# Altium PCB LazeRX-9c.PcbDoc
Units mm, origin at the board's own origin, x right, y up, seen from the top; angles counter-clockwise.
Board outline 42 x 28 mm, 2 copper layers (Top Layer, Bottom Layer); 46 components, 48 nets, 162 pads, 62 vias.
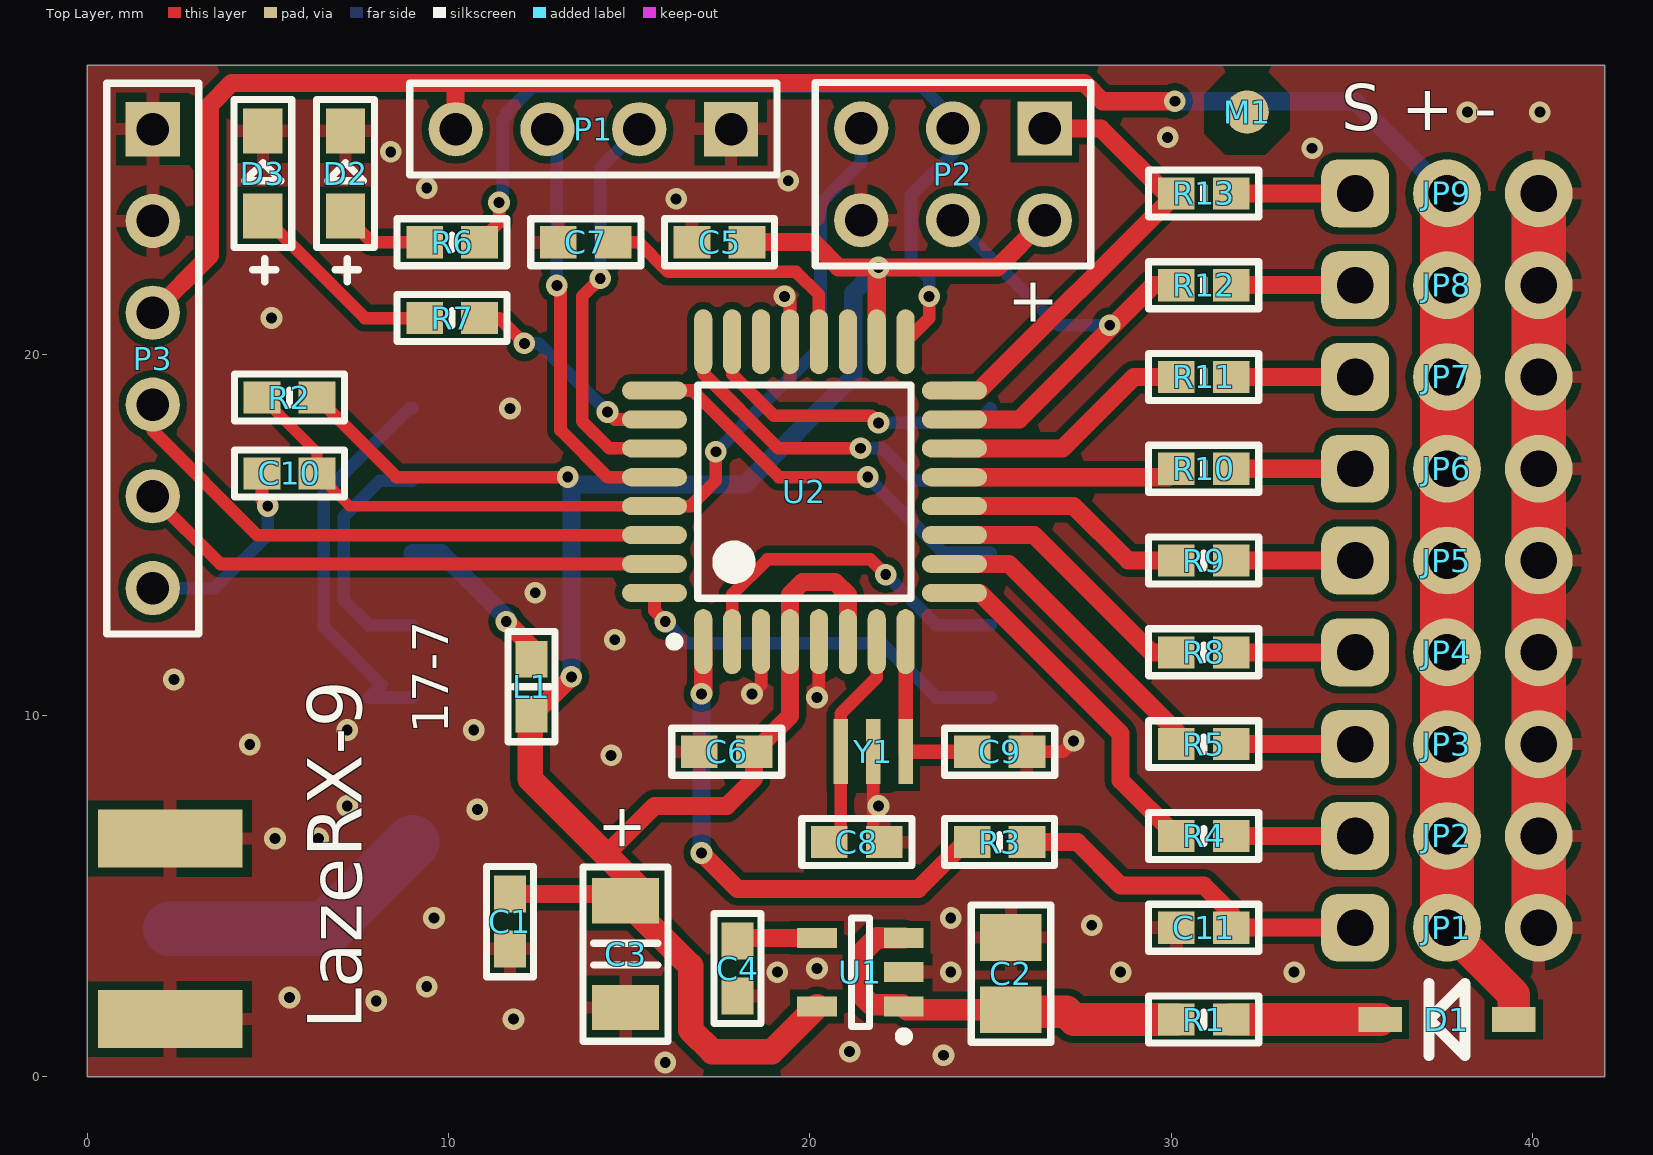
[diagram p0: Top Layer view]
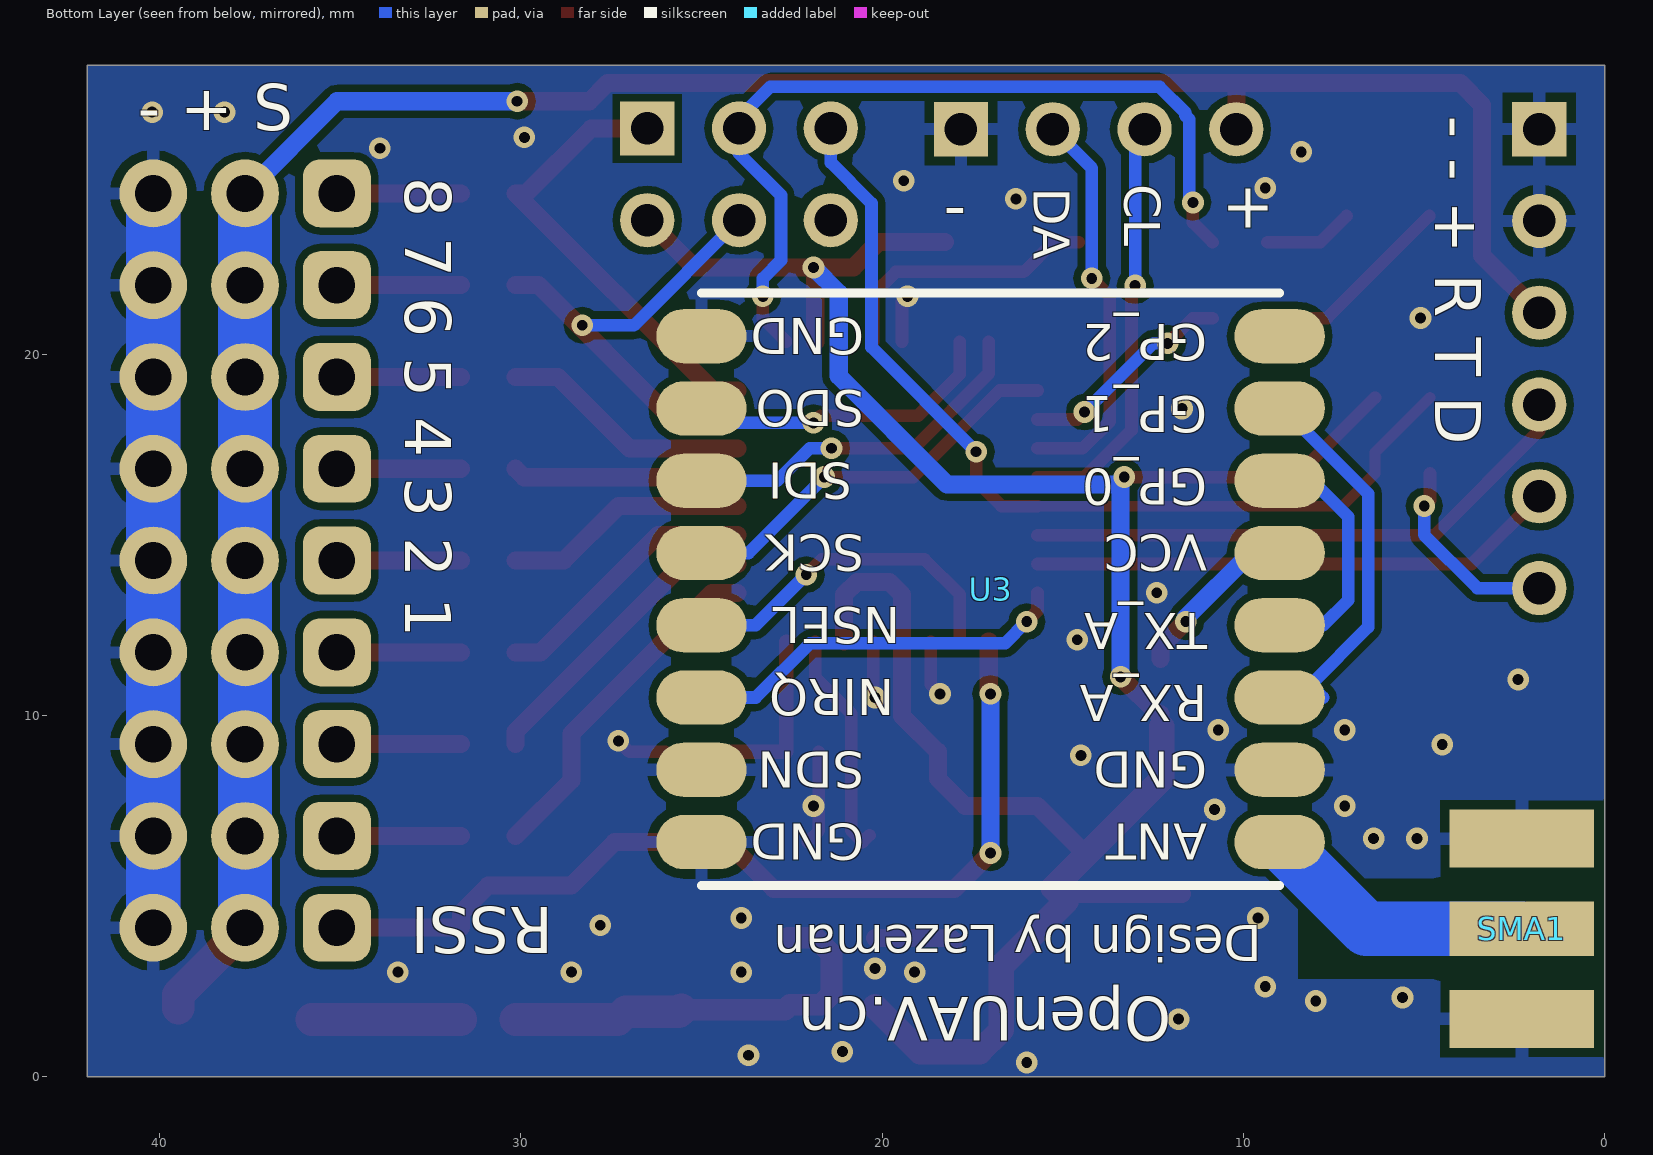
[diagram p1: Bottom Layer view, seen from below]

## Layer stack, top to bottom
Top Solder: solder mask 0.0102, Solder Resist, Dk 3.5
Top Layer: signal copper 0.0356
Dielectric 1: dielectric 0.32, FR-4, Dk 4.8
Bottom Layer: signal copper 0.0356
Bottom Solder: solder mask 0.0102, Solder Resist, Dk 3.5

## Board outline
0,0 0,28 42,28 42,0

## Design rules (kind name [scope] priority, off if disabled: settings)
Clearance Clearance_2 [InNamedPolygon('TOP')] p1: gap=0.2
Clearance [InPolygon] p2 off: gap=0.25
Clearance Clearance_1 [All] p3: gap=0.2
ComponentClearance [All] p1: gap=0.25 collisioncheckmode=3 verticalgap=0.254 showdistances=FALSE
HoleSize [All] p1: absolutevalues=TRUE maxlimit=3 minlimit=0.3 maxpercent=80.000 minpercent=20.000
HoleToHoleClearance [All] p1: gap=0.2 allowstackedmicrovias=TRUE
MinimumSolderMaskSliver [All] p1: minsoldermaskwidth=0
PolygonConnect PolygonConnect_1 [isVia vs InNet('Gnd')] p1: connectstyle=Direct reliefconductorwidth=0.254 reliefentries=4 polygonreliefangle="90 Angle" airgapwidth=0.254
PolygonConnect [All] p2: connectstyle=Relief reliefconductorwidth=0.35 reliefentries=4 polygonreliefangle="90 Angle" airgapwidth=0.254
RoomDefinition LazeRX-9c [InComponentClass('LazeRX-9c')] p1: confinementstyle=ConfineOut formatcopy=TRUE lockcomponents=FALSE outline 51.7,33.2 81.9,33.2 81.9,62.8 51.7,62.8
RoutingVias [All] p1: holewidth=0.3 width=0.6 viastyle="Through Hole" minholewidth=0.3 minwidth=0.6 maxholewidth=3 maxwidth=3
SilkToSilkClearance [All] p1: silktosilkclearance=0
SilkToSolderMaskClearance [IsPad] p1: minsilkscreentomaskgap=0 clearancetoexposedcopper=TRUE
SolderMaskExpansion [All] p1: expansion=0.102
Width [All] p1: maxlimit=3 minlimit=0.2 preferedwidth=0.3
24 further rules are at their usual default settings.

## Components (designator, comment, footprint, x,y, rotation, side; value= is the part's Value field where it differs from the comment)
C1 "104" "0603 CAP" 11.7,4.3 r90 top locked
C2 "4.7uF/6.3V" 1206 25.565,2.86 r90 top locked
C3 "4.7uF/6.3V" "1206 CAP" 14.9,3.4 r270 top locked
C4 "470pF" "0603 CAP" 18,3 r90 top locked
C5 "104" "0603 CAP" 17.5,23.1 r0 top locked
C6 "104" "0603 CAP" 17.7,9 r0 top locked
C7 "104" "0603 CAP" 13.8,23.1 r0 top
C8 "22p" "0603 CAP" 21.3,6.5 r180 top locked
C9 "22p" "0603 CAP" 25.25,9 r180 top locked
C10 "104" "0603 CAP" 5.6,16.7 r180 top
C11 "1uF" "0603 CAP" 30.898,4.13 r0 top locked
D1 "Diode" DIODE-SOD123 37.63,1.59 r180 top locked
D2 "Gre" "0805 LED" 7.15,25 r270 top locked
D3 "Red" "0805 LED" 4.864,25 r270 top locked
JP1 "Servo out 1" "JP - compact" 37.63,4.13 r0 top locked
JP2 "Servo out 1" "JP - compact" 37.63,6.67 r0 top locked
JP3 "Servo out 1" "JP - compact" 37.63,9.21 r0 top locked
JP4 "Servo out 1" "JP - compact" 37.63,11.75 r0 top locked
JP5 "Servo out 1" "JP - compact" 37.63,14.29 r0 top locked
JP6 "Servo out 1" "JP - compact" 37.63,16.83 r0 top locked
JP7 "Servo out 1" "JP - compact" 37.63,19.37 r0 top locked
JP8 "Servo out 1" "JP - compact" 37.63,21.91 r0 top locked
JP9 "Servo out 1" "JP - compact" 37.63,24.45 r0 top locked
L1 "FB 300mA" "0603 IND" 12.3,10.8 r270 top
M1 "Mark" MarkPoint 32.1,26.7 r0 top
P1 "Header 4" HDR1X4 17.818,26.228 r180 top locked
P2 "ISP" HDR2X3 26.5,26.25 r180 top locked
P3 "Header 6" HDR1X6 1.816,26.228 r270 top locked
R1 "0R" "0603 RES" 30.9,1.59 r0 top locked
R2 "10k" "0603 RES" 5.6,18.8 r180 top
R3 "10k" "0603 RES" 25.25,6.5 r0 top locked
R4 "1k" "0603 RES" 30.9,6.67 r0 top locked
R5 "1k" "0603 RES" 30.9,9.21 r0 top locked
R6 "300R" "0603 RES" 10.1,23.1 r0 top locked
R7 "300R" "0603 RES" 10.1,21 r0 top locked
R8 "1k" "0603 RES" 30.9,11.75 r0 top locked
R9 "1k" "0603 RES" 30.9,14.29 r0 top locked
R10 "1k" "0603 RES" 30.9,16.83 r0 top locked
R11 "1k" "0603 RES" 30.9,19.37 r0 top locked
R12 "1k" "0603 RES" 30.9,21.91 r0 top locked
R13 "1k" "0603 RES" 30.9,24.45 r0 top locked
SMA1 "SMA Base" "ANT SMA" 2.3,4.1 r90 bottom locked
U1 "5205 linear regulator" 5205 21.4,2.9 r180 top locked
U2 "ATmega328" ATMEGA328FIX 19.85,16.195 r90 top locked
U3 "RFM22" RFM22SMD 17,13.5 r0 bottom locked
Y1 "Crystal3Foot" Crystal3Foot 21.75,9 r90 top locked

## Footprints (in the part's own frame and the unit in brackets; to place one, negate y for a bottom-side part, rotate by r counter-clockwise, add the part's x,y. Pads: shape width x height; smd on the part's side, far side on the other; paste and mask are expansions set on the pad)
"0603 CAP" [mil]
  rect 40x35 smd: 1(-29.92,0) 2(29.92,0)
  silkscreen extent -60,-26 60,26
"0603 IND" [mil]
  rect 40x35 smd: 1(-29.92,0) 2(29.92,0)
  silkscreen extent -60,-26 60,26
"0603 RES" [mil]
  rect 40x35 smd: 1(-29.92,0) 2(29.92,0)
  silkscreen extent -60,-26 60,26
"0805 LED" [mil]
  rect 49x43 smd: 1(46.26,0) 2(-46.26,0)
  silkscreen extent -81,-31 118,31
1206 [mm]
  rect 1.3x1.7 smd: 1(-1,0) 2(1,0)
  silkscreen extent -1.9,-1.1 1.9,1.1
"1206 CAP" [mm]
  rect 1.25x1.85 smd: 1(-1.475,0) 2(1.475,0)
  silkscreen extent -2.41,-1.18 2.41,1.17
5205 [mm] "SOT23, 5-Leads, Body 3.0x3.0mm (max), Pitch 0.95mm, IPC Medium Density"
  rect 1.1x0.55 smd: 1(-1.2,0.95) 2(-1.2,0) 3(-1.2,-0.95) 4(1.2,-0.95) 5(1.2,0.95)
  silkscreen extent -1.33,-1.5 0.25,1.9, body extent -0.87,-1.5 0.87,1.5, height 1.3
"ANT SMA" [mm]
  rect 1.5x4 smd: 1(0,0)
  rect 1.6x4 smd far side: 2(-2.5,0) 2(2.5,0)
  rect 1.6x4 smd: 2(-2.5,0) 2(2.5,0)
ATMEGA328FIX [mm] "QFP, 32-Leads, Body 9.0x9.0mm (max), Pitch 0.80mm, IPC Medium Density"
  oval 1.8x0.5 smd: 1(-4.15,2.8) 2(-4.15,2) 3(-4.15,1.2) 4(-4.15,0.4) 5(-4.15,-0.4) 6(-4.15,-1.2) 7(-4.15,-2) 8(-4.15,-2.8) 17(4.15,-2.8) 18(4.15,-2) 19(4.15,-1.2) 20(4.15,-0.4) 21(4.15,0.4) 22(4.15,1.2) 23(4.15,2) 24(4.15,2.8)
  oval 0.5x1.8 smd: 9(-2.8,-4.15) 10(-2,-4.15) 11(-1.2,-4.15) 12(-0.4,-4.15) 13(0.4,-4.15) 14(1.2,-4.15) 15(2,-4.15) 16(2.8,-4.15) 25(2.8,4.15) 26(2,4.15) 27(1.2,4.15) 28(0.4,4.15) 29(-0.4,4.15) 30(-1.2,4.15) 31(-2,4.15) 32(-2.8,4.15)
  silkscreen extent -4.27,-2.95 2.95,3.72, body extent -3.5,-3.5 3.5,3.5, height 2
Crystal3Foot [mm]
  rect 1.8x0.4 smd: 1(0,0.9) 2(0,0) 3(0,-0.9)
  body extent -0.8,-1.5 0.8,1.5, height 0.5
DIODE-SOD123 [mm]
  rect 1.2x0.7 smd: 1(-1.85,0) 2(1.85,0)
  silkscreen extent -0.5,-1 0.5,1, body extent -1.25,-0.75 1.25,0.75, height 1
HDR1X4 [mm] "Connector; Header; 4 Position"
  rect 1.5x1.5 hole 0.9: 1(0,0)
  round 1.5 hole 0.9: 2(2.54,0) 3(5.08,0) 4(7.62,0)
  silkscreen extent -1.27,-1.27 8.89,1.27
HDR1X6 [mm] "Connector; Header; 6 Position"
  rect 1.5x1.5 hole 0.9: 1(0,0)
  round 1.5 hole 0.9: 2(2.54,0) 3(5.08,0) 4(7.62,0) 5(10.16,0) 6(12.7,0)
  silkscreen extent -1.27,-1.27 13.97,1.27
HDR2X3 [mm] "Connector; Header; 3x2 Position"
  rect 1.5x1.5 hole 0.9: 1(0,0)
  round 1.5 hole 0.9: 2(0,2.54) 3(2.54,0) 4(2.54,2.54) 5(5.08,0) 6(5.08,2.54)
  silkscreen extent -1.27,-1.27 6.35,3.81
"JP - compact" [mil]
  rrect50% 74x74 hole 40: 1(-100,0)
  round 74 hole 40: 2(0,0) 3(100,0)
  body extent -148,-30 138,30, height 394
MarkPoint [mm]
  round 1.2 smd: 0(0,0)
  round 1.8 on Top Solder: 0(0,0)
  Top Layer pour cut-out: -0.5,1.2 0.5,1.2 1.2,0.5 1.2,-0.5 0.5,-1.2 -0.6,-1.2 -1.2,-0.6 -1.2,0.5
RFM22SMD [mm]
  oval 2.5x1.5 smd: 1(-8,7) 2(-8,5) 3(-8,3) 4(-8,1) 5(-8,-1) 6(-8,-3) 7(-8,-5) 8(-8,-7) 9(8,-7) 10(8,-5) 11(8,-3) 12(8,-1) 13(8,1) 14(8,3) 15(8,5) 16(8,7)
  silkscreen extent -8,-8.2 8,8.2

## Part data
C1 C4 C5 C6 C7 C8 C9 C10 C11: library part CAP, "Capacitor"
C2 C3: library part "Cap Pol", "Capacitor"
D2 D3: library part LED, "Typical RED, GREEN, YELLOW, AMBER GaAs LED"
JP1 JP2 JP3 JP4 JP5 JP6 JP7 JP8 JP9: library part "Hdr 3 Pin 0.1", "Header, 3-Pin, 0.1\""
L1: library part FerriteBead_300mA, "Ferrite Bead 300mA"
P1: "Header, 4-Pin"
P2: library part "Header 3X2", "Header, 3-Pin, Dual row"
P3: "Header, 6-Pin"
R1 R2 R3 R4 R5 R6 R7 R8 R9 R10 R11 R12 R13: library part Res, "Resistor"

## Via types
v1: diameter 0.6, hole 0.3, Top Layer to Bottom Layer, tented both sides, 62 vias

## Nets (pads, with @x,y where several pads share a name; then routed paths per layer and width w, separated by ;. In a path a pad name is that pad's centre, name@x,y a point inside that pad or via, vN(x,y) a via of type N, cw(c..) or ccw(c..) an arc to the next point about the centre after c; other vN are vias at no path point)
5V: C2.1 R1.1 U1.1 U1.3 | length 11.5
  Top Layer w0.6: U1.3 21.85,3.85 21.4,3.4 21.4,2.3 21.7,2 22.55,2 U1.1 22.69,1.86 C2.1
  Top Layer w0.9: C2.1 25.625,1.8 27.1,1.8 27.31,1.59 R1.1
A0: U2.23 U3.10 | length 8.8
  Top Layer w0.35: U2.23 17.85,19.45 19,18.3 21.7,18.3 v1(21.9,18.1)
  Bottom Layer w0.35: v1(21.9,18.1) 24.6,18.1 U3.10
A1: U2.24 U3.11 | length 10.1
  Top Layer w0.35: U2.24 17.05,19.472 19.122,17.4 v1(21.4,17.4)
  Bottom Layer w0.35: v1(21.4,17.4) 22,17.4 22.9,16.5 U3.11
A2: U2.25 U3.12 | length 11.2
  Top Layer w0.35: U2.25 16.749,18.995 19.144,16.6 v1(21.6,16.6)
  Bottom Layer w0.35: v1(21.6,16.6) 23.7,14.5 U3.12
A3: R7.2 U2.26 | length 6
  Top Layer w0.35: R7.2 11.4,21 v1(12.1,20.3) ; v1(14.4,18.4) 14.605,18.195 U2.26
  Bottom Layer w0.35: v1(12.1,20.3) 12.5,20.3 v1(14.4,18.4)
A4/SDA: P1.2 U2.27 | length 11
  Top Layer w0.35: v1(14.2,22.1) 13.7,21.6 13.7,18.145 14.45,17.395 U2.27
  Bottom Layer w0.35: v1(14.2,22.1) 14.2,25.15 P1.2
A5/SCL: P1.3 U2.28 | length 11.7
  Top Layer w0.35: v1(13,21.9) 13.1,21.8 13.1,17.9 14.405,16.595 U2.28
  Bottom Layer w0.35: P1.3 12.738,25.962 13,25.7 v1@13,21.8
A6: U2.19
A7: U2.22
AREF: C7.2 U2.20 | length 7.6
  Top Layer w0.35: C7.2 15.257,23.1 16.077,22.28 19.62,22.28 20.25,21.65 U2.20
D2: U2.32 U3.14 | length 10.8
  Top Layer w0.35: U2.32 15.7,12.9 v1(16,12.6)
  Bottom Layer w0.35: v1(16,12.6) 16.6,12 22,12 23.5,10.5 U3.14
D3: R3.1 U2.1 | length 14.3
  Top Layer w0.5: v1(17,6.2) 18,5.2 23,5.2 24.3,6.5 R3.1 ; v1(17,10.6) 17.05,10.65 U2.1
  Bottom Layer w0.5: v1(17,6.2) v1(17,10.6)
D4: U2.2 U3.13 | length 9.6
  Top Layer w0.35: U2.2 17.85,13.35 18.825,14.325 21.675,14.325 v1(22.1,13.9)
  Bottom Layer w0.35: v1(22.1,13.9) 23.5,12.5 U3.13
D5: R4.1 U2.9 | length 9.7
  Top Layer w0.5: U2.9 24.705,13.395 28.6,9.5 28.6,8.21 R4.1
D6: R5.1 U2.10 | length 8.4
  Top Layer w0.5: U2.10 25.505,14.195 30.14,9.56 R5.1
D7: R8.1 U2.11 | length 7.5
  Top Layer w0.5: U2.11 26.205,14.995 29.45,11.75 R8.1
D8: R9.1 U2.12 | length 6.8
  Top Layer w0.5: U2.12 24.005,15.8 27.3,15.8 28.81,14.29 R9.1
D9: R10.1 U2.13 | length 6.2
  Top Layer w0.5: U2.13 29.905,16.595 R10.1
D10: R11.1 U2.14 | length 7
  Top Layer w0.5: U2.14 26.995,17.395 28.97,19.37 R11.1
D11/MO: P2.4 R12.1 U2.15 | length 13.2
  Top Layer w0.5: U2.15 25.795,18.195 29.51,21.91 R12.1
  Bottom Layer w0.35: P2.4 26.87,20.8 v1(28.3,20.8)
D12/MI: P2.1 R13.1 U2.16 | length 12.8
  Top Layer w0.5: U2.16 24.685,18.995 R13.1 29.85,24.45 28.05,26.25 P2.1
D13/SCK: P2.3 R6.2 U2.17 | length 24.1
  Top Layer w0.35: R6.2 11.4,23.64 v1(11.4,24.2) ; U2.17 23.3,20.995 v1(23.3,21.6)
  Bottom Layer w0.35: v1(11.4,24.2) 11.5,24.3 11.5,26.5 11.613,26.613 11.613,26.694 12.319,27.4 23.1,27.4 23.96,26.54 P2.3 23.96,25.56 22.8,24.4 22.8,22.6 23.3,22.1 v1(23.3,21.6)
DTR: C10.2 P3.6 | length 5.6
  Top Layer w0.35: C10.2 4.84,15.96 v1(5,15.8)
  Bottom Layer w0.35: P3.6 3.528,13.528 5,15 v1(5,15.8)
GND: C1.1 C2.2 C3.2 C4.1 C5.1 C6.1 C7.1 C8.1 C9.1 C11.1 D2.2 D3.2 JP1.3 JP2.3 JP3.3 JP4.3 JP5.3 JP6.3 JP7.3 JP8.3 JP9.3 P1.1 P2.6 P3.1 P3.2 SMA1.2 U1.2 U2.3 U2.5 U2.21 U3.2 U3.9 U3.15 U3.16 Y1.2 | length 49.1
  Top Layer w0.35: v1(18.4,10.6) 18.65,10.85 U2.3 ; v1(19.3,21.6) 19.45,21.45 U2.21 ; v1(20.2,10.5) 20.25,10.55 U2.5 ; Y1.2 21.75,6.81 C8.1 ; C9.1 27,9 v1(27.3,9.3)
  Top Layer w1.5: JP1.3 JP2.3 JP3.3 JP4.3 JP5.3 JP6.3 JP7.3 JP8.3 JP9.3
  Bottom Layer w1.5: JP1.3 JP2.3 JP3.3 JP4.3 JP5.3 JP6.3 JP7.3 JP8.3 JP9.3
  other v1: 16,0.4 23.7,0.6 21.1,0.7 11.8,1.6 8,2.1 5.6,2.2 9.4,2.5 19.1,2.9 23.9,2.9 28.6,2.9 33.4,2.9 20.2,3 27.8,4.2 9.6,4.4 23.9,4.4 5.2,6.6 6.4,6.6 10.8,7.4 7.2,7.5 21.9,7.5 14.5,8.9 4.5,9.2 7.2,9.6 10.7,9.6 2.4,11 14.6,12.1 12.4,13.4 11.7,18.5 5.1,21 16.3,24.3 9.4,24.6 19.4,24.8 8.4,25.6 33.9,25.7 29.9,26 38.2,26.7 40.2,26.7
INPUT: D1.1 JP1.2 JP2.2 JP3.2 JP4.2 JP5.2 JP6.2 JP7.2 JP8.2 JP9.2 P1.4 P3.3 | length 87.1
  Top Layer w0.5: P3.3 3.4,22.732 3.4,26.9 4,27.5 10.2,27.5 ; P1.4 10.198,27.498 10.2,27.5 ; v1(30.1,27) 28.1,27 27.6,27.5 10.2,27.5
  Top Layer w0.9: JP1.2 39.48,2.28 D1.1@39.48,1.9
  Top Layer w1.5: JP1.2 JP2.2 JP3.2 JP4.2 JP5.2 JP6.2 JP7.2 JP8.2 JP9.2
  Bottom Layer w0.5: v1(30.1,27) 35.08,27 JP9.2
  Bottom Layer w1.5: JP1.2 JP2.2 JP3.2 JP4.2 JP5.2 JP6.2 JP7.2 JP8.2 JP9.2
NetC4_2: C4.2 U1.4 | length 2.2
  Top Layer w0.5: C4.2 18.09,3.85 U1.4
NetC8_2: C8.2 U2.7 Y1.1 | length 6.4
  Top Layer w0.35: C8.2@20.35,6.69 C8.2 20.85,6.81 Y1.1 20.85,10.05 21.85,11.05 U2.7
NetC9_2: C9.2 U2.8 Y1.3 | length 4.9
  Top Layer w0.4: U2.8 Y1.3 C9.2
NetD1_2: D1.2 R1.2 | length 4.1
  Top Layer w0.9: R1.2 D1.2
NetD2_1: D2.1 R6.1 | length 2.5
  Top Layer w0.35: D2.1 7.875,23.1 R6.1
NetD3_1: D3.1 R7.1 | length 5.6
  Top Layer w0.35: D3.1 7.689,21 R7.1
NetJP2_1: JP2.1 R4.2 | length 3.4
  Top Layer w0.5: R4.2 JP2.1
NetJP3_1: JP3.1 R5.2 | length 3.4
  Top Layer w0.5: R5.2 JP3.1
NetJP4_1: JP4.1 R8.2 | length 3.4
  Top Layer w0.5: R8.2 JP4.1
NetJP5_1: JP5.1 R9.2 | length 3.4
  Top Layer w0.5: R9.2 JP5.1
NetJP6_1: JP6.1 R10.2 | length 3.4
  Top Layer w0.5: R10.2 JP6.1
NetJP7_1: JP7.1 R11.2 | length 3.4
  Top Layer w0.5: R11.2 JP7.1
NetJP8_1: JP8.1 R12.2 | length 3.4
  Top Layer w0.5: R12.2 JP8.1
NetJP9_1: JP9.1 R13.2 | length 3.4
  Top Layer w0.5: R13.2 JP9.1
NetL1_1: L1.1 U3.5 | length 4.8
  Top Layer w0.5: v1(11.6,12.6) 12.3,11.9 L1.1
  Bottom Layer w0.5: U3.5 9.8,14.5 11.6,12.7 v1(11.6,12.6)
NetSMA1_1: SMA1.1 U3.1 | length 7.7
  Bottom Layer w1.5: SMA1.1 6.6,4.1 U3.1
NetU3_3: U3.3 U3.7 | length 11.1
  Bottom Layer w0.35: U3.3 7.8,10.5 8.15,10.85 6.55,12.45 6.55,16.141 8.909,18.5 U3.7
NetU3_4: U3.4 U3.6 | length 6.8
  Bottom Layer w0.35: U3.4 7.8,12.5 7.1,13.2 7.1,15.5 8.1,16.5 U3.6
RESET: C10.1 P2.5 R2.2 U2.29 | length 25.9
  Top Layer w0.3: R2.2 6.36,17.28 C10.1 7.265,15.795 U2.29
  Top Layer w0.35: U2.29 16.695,15.795 17.4,16.5 v1(17.4,17.3)
  Bottom Layer w0.35: v1(17.4,17.3) 20.295,20.195 20.295,24.176 21.42,25.301 P2.5
RSSI: C11.2 JP1.1 R3.2 | length 10.3
  Top Layer w0.5: R3.2 27.4,6.5 28.6,5.3 30.9,5.3 31.658,4.542 C11.2 JP1.1
RXI: P3.4 U2.30 | length 15.8
  Top Layer w0.35: P3.4 1.816,17.884 4.705,14.995 U2.30
TXO: P3.5 U2.31 | length 14.7
  Top Layer w0.35: P3.5 3.689,14.195 U2.31
VCC: C1.2 C3.1 C5.2 C6.2 L1.2 P2.2 R2.1 U1.5 U2.4 U2.6 U2.18 | length 70.2
  Top Layer w0.35: R2.1 8.56,16.6 v1(13.3,16.6)
  Top Layer w0.5: C1.2 C3.1@15.085,5.06 ; L1.2 12.369,10.04 v1(13.4,11.071) ; 14.4,6.2 15.7,7.5 17.7,7.5 18.46,8.26 C6.2 19.45,9.99 U2.4 19.45,13.35 19.8,13.7 20.7,13.7 21.05,13.35 U2.6 ; C3.1@14.715,5.06 C3.1 ; C5.2 20.1,23.1 20.8,22.4 25.19,22.4 P2.2 ; U2.18 v1@21.85,22.4
  Top Layer w0.7: L1.2@12.26,9.7 12.26,8.24 15.262,5.237 C3.1@15.085,5.06 ; C3.1 16.7,3.075 16.7,1.3 17.3,0.7 18.95,0.7 U1.5
  Bottom Layer w0.5: v1(13.3,16.6) 13.4,16.5 v1@13.4,16.4 ; v1(13.4,11.071) v1@13.4,16.4 ; v1(21.9,22.4) 21.2,21.7 21.2,19.4 18.2,16.4 v1@13.4,16.4
pads on no net: M1.0 U3.8

## Polygon pours and split planes (outlines as drawn)
GND on Top Layer "TOP" (solid, pour order 0): 0,0 0,28 42,28 42,0
GND on Bottom Layer "GND_L02_P001" (solid, pour order 1): 0,0 0,28 42,28 42,0

## Other copper
Bottom Layer:
  pour cut-out: 0,5.5 5.3,5.5 7.8,5.5 8.5,5.5 8.5,4.1 8.5,2.7 5.3,2.7 0,2.7

## Silkscreen, mask and mechanical layers (free items; w line width, h text height)
Top Overlay:
  text "S + -" at 34.7,26.2 h1.27
  text "+" at 26.9,20.9 h1.25
  text "17-7" at 10,9.5 h1 r90
  text "LazeRX-9" at 7.6,1.3 h1.5 r90
Bottom Overlay:
  text "- - + R T D" at 4.7,26.6 h1.27 r90
  text "- + S" at 40.6,26.2 h1.27
  text "8 7 6 5 4 3 2 1" at 33.2,24.9 h1.27 r90
  text "CL" at 13.3,24.7 h1 r90
  text "DA" at 15.8,24.6 h1 r90
  text "+" at 10.6,23.5 h1.27
  text "-" at 18.3,23.5 h1.27
  text "RSSI" at 29.1,4.7 h1.27 r180
  text "Design by Lazeman" at 9.5,4.2 h1 r180
  text "OpenUAV.cn" at 12,2.2 h1.2 r180
Mechanical 1:
  the board outline again, w0.2

## Text inside footprints (layer, text, board x,y; h text height)
C3: Top Overlay "+" at 14.3,6.2 h1.2 r270
U3: Bottom Overlay "SDO" at 20.5,19 h1 r180; Bottom Overlay "SDI" at 20.833,17 h1 r180; Bottom Overlay "SCK" at 20.5,15 h1 r180; Bottom Overlay "NSEL" at 19.5,13 h1 r180; Bottom Overlay "NIRQ" at 19.667,11 h1 r180; Bottom Overlay "SDN" at 20.5,9 h1 r180; Bottom Overlay "GND" at 20.5,21 h1 r180; Bottom Overlay "GND" at 20.5,7 h1 r180; Bottom Overlay "GP_2" at 11,20.833 h1 r180; Bottom Overlay "GP_1" at 11,18.833 h1 r180; Bottom Overlay "GP_0" at 11,16.833 h1 r180; Bottom Overlay "VCC" at 11,15 h1 r180; Bottom Overlay "TX_A" at 11,12.833 h1 r180; Bottom Overlay "RX_A" at 11,10.833 h1 r180; Bottom Overlay "GND" at 11,9 h1 r180; Bottom Overlay "ANT" at 11,7 h1 r180